# EAGLE board potbot_v7 (EAGLE 7.6.0)
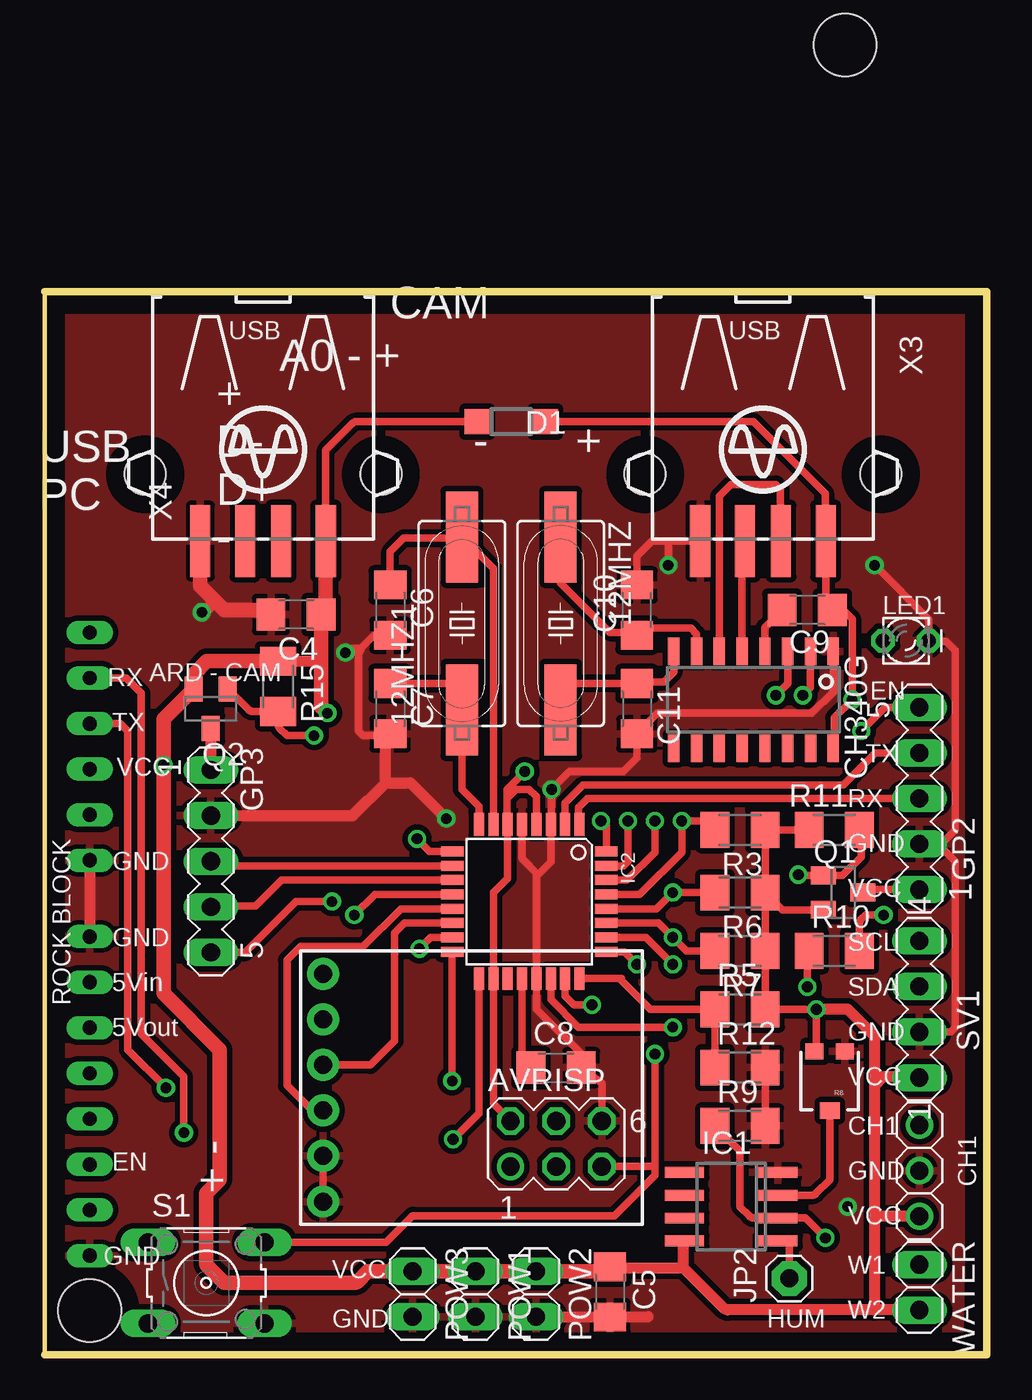
[diagram p0: board, top side]
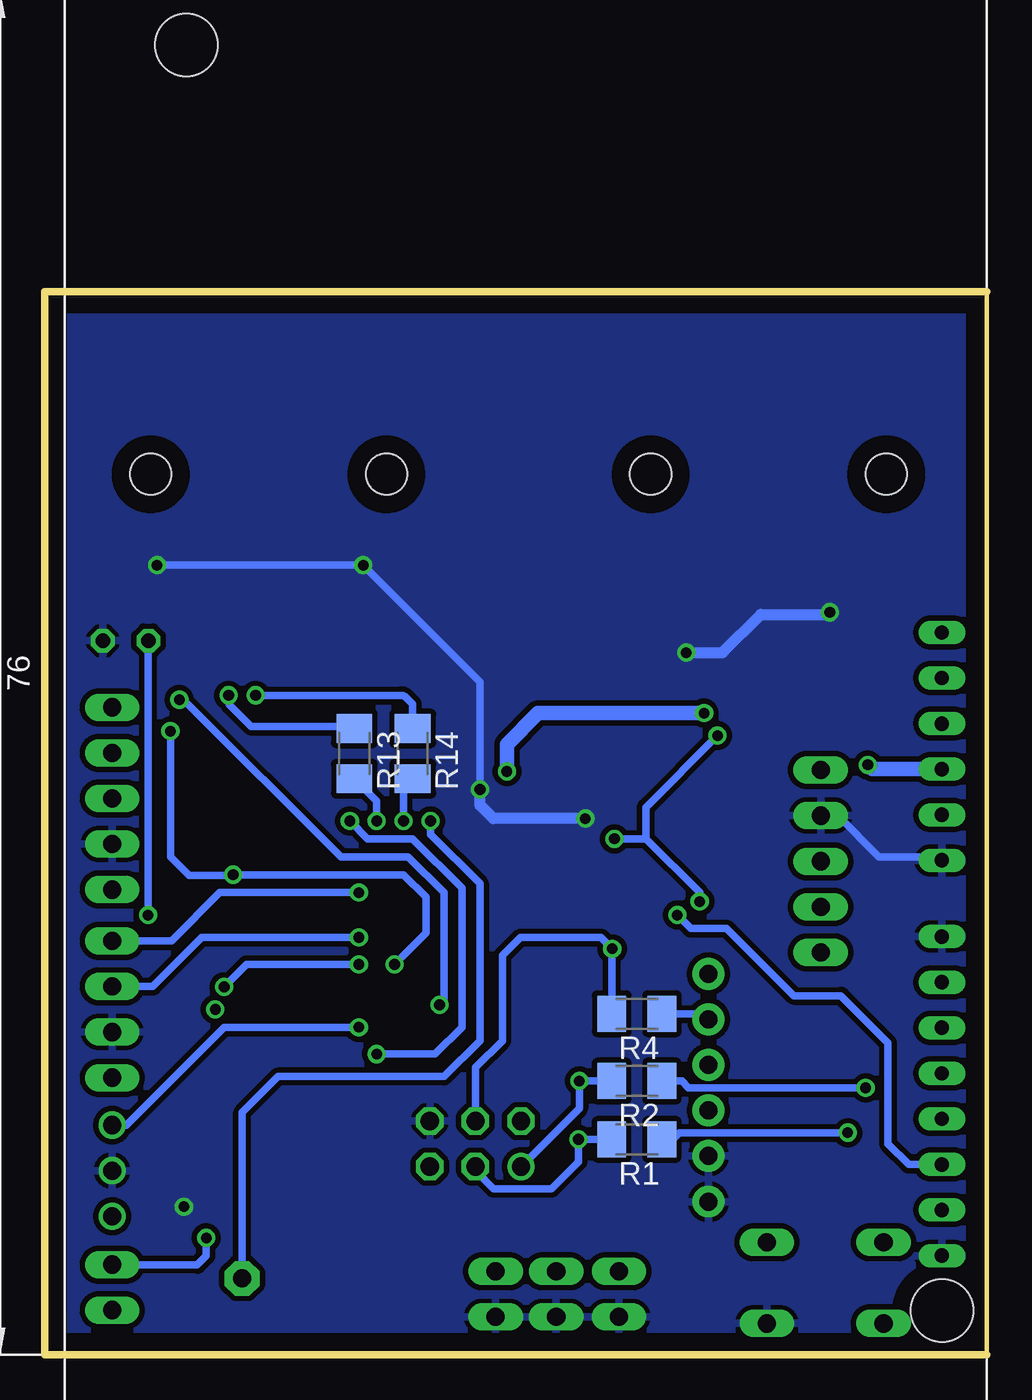
[diagram p1: board, bottom side, seen from below]

Size 52.5 x 59.25 mm. Coordinates in mm from the lower left corner, seen from the top.
Outline: 0,0 0,59.25 52.5,59.25 52.5,0 0,0
Copper layers (1*16): Top 0.035mm / dielectric 1.5mm / Bottom 0.035mm
Design rules "default *": minimum track width 0.14960625mm, minimum drill 24mil, track to track 6mil, track to pad 6mil, pad to pad 6mil, via to via 6mil, smd to smd 4mil, copper to edge 40mil, drill to drill 8mil, minimum pad ring 10mil, minimum via ring 8mil, stop-mask expansion 0mil, vias tented up to drill 0mil, thermal gap 10mil
Net classes: 1 supply: width 0.127 mm, clearance 0.203 mm

## Footprints (pad centres in the part's own frame; a part is rotated, then mirrored left to right if it is on the bottom)
SM49 = smd 5.08 x 1.778: 1 -4.826,0; 2 4.826,0
MA03-2 = drill 1.016: 1 -2.54,-1.27 | drill 1.016 octagon: 2 -2.54,1.27; 3 0,-1.27; 4 0,1.27; 5 2.54,-1.27; 6 2.54,1.27
OPENLOG = drill 1 pad 1.778: 1 13.97,1.27; 2 11.43,1.27; 3 8.89,1.27; 4 6.35,1.27; 5 3.81,1.27; 6 1.27,1.27
ROCKBLOCK = drill 0.8 long: 1 40.25,2.5; 2 37.71,2.5; 3 35.17,2.5; 4 32.63,2.5; 5 30.09,2.5; 6 27.55,2.5; 7 23.3,2.5; 8 20.76,2.5; 9 18.22,2.5; 10 15.68,2.5; 11 13.14,2.5; 12 10.6,2.5; 13 8.06,2.5; 14 5.52,2.5 | hole 3.5: 2.45,2.5; 73,44.6
C1206 = smd 1.6 x 1.8: 1 -1.4,0; 2 1.4,0
1X03 = drill 1.016: 1 -2.54,0; 2 0,0; 3 2.54,0
SOD123 = smd 1.4 x 1.4: A 1.9,0; C -1.9,0
MA05-1 = drill 1.016 long: 1 -5.08,0; 2 -2.54,0; 3 0,0; 4 2.54,0; 5 5.08,0
SO08 = smd 0.6 x 2.2: 1 -1.905,-2.6; 2 -0.635,-2.6; 3 0.635,-2.6; 4 1.905,-2.6; 5 1.905,2.6; 6 0.635,2.6; 7 -0.635,2.6; 8 -1.905,2.6
TQFP32-08 = smd 1.27 x 0.559: 1 -4.293,2.8; 2 -4.293,2; 3 -4.293,1.2; 4 -4.293,0.4; 5 -4.293,-0.4; 6 -4.293,-1.2; 7 -4.293,-2; 8 -4.293,-2.8; 17 4.293,-2.8; 18 4.293,-2; 19 4.293,-1.2; 20 4.293,-0.4; 21 4.293,0.4; 22 4.293,1.2; 23 4.293,2; 24 4.293,2.8 | smd 0.559 x 1.27: 9 -2.8,-4.293; 10 -2,-4.293; 11 -1.2,-4.293; 12 -0.4,-4.293; 13 0.4,-4.293; 14 1.2,-4.293; 15 2,-4.293; 16 2.8,-4.293; 25 2.8,4.293; 26 2,4.293; 27 1.2,4.293; 28 0.4,4.293; 29 -0.4,4.293; 30 -1.2,4.293; 31 -2,4.293; 32 -2.8,4.293
1X01 = drill 1.016 pad 1.93 octagon: 1 0,0
LED_LD260 = drill 0.813 octagon: A -1.27,0; K 1.27,0
1X02 = drill 1.016 long: 1 -1.27,0; 2 1.27,0
SOT23 = smd 1 x 1.4: 1 -0.95,-1.1; 2 0.95,-1.1; 3 0,1.1
M1206 = smd 1.6 x 2: 1 -1.4,0; 2 1.4,0
TRIMPOT-3MM = smd 1 x 0.9: 1 -0.85,-1.65; 3 0.85,-1.65 | smd 1.1 x 0.9: 2 0,1.65
B3F-10XX = drill 1.016 long: 1 -3.251,2.261; 2 3.251,2.261; 3 -3.251,-2.261; 4 3.251,-2.261
MA04-1 = drill 1.016 long: 1 -3.81,0; 2 -1.27,0; 3 1.27,0; 4 3.81,0
SOIC16 = smd 0.635 x 1.524: 1 -4.445,-2.695; 2 -3.175,-2.695; 3 -1.905,-2.695; 4 -0.635,-2.695; 5 0.635,-2.695; 6 1.905,-2.695; 7 3.175,-2.695; 8 4.445,-2.695; 9 4.445,2.695; 10 3.175,2.695; 11 1.905,2.695; 12 0.635,2.695; 13 -0.635,2.695; 14 -1.905,2.695; 15 -3.175,2.695; 16 -4.445,2.695
USB-A003 = smd 1.12 x 4: 1 -3.5,14; 2 -1,14; 3 1,14; 4 3.5,14 | hole 2.3: -6.57,10.28; 6.57,10.28

## Placement (x,y rotation side)
12MHZ  [SM49]  28.75,40.75 270 top
12MHZ1  [SM49]  23.25,40.75 90 top
AVRISP  [MA03-2]  28.5,11.75 0 top
BRD1  OPENLOG  [OPENLOG]  14.25,22.5 270 top
BRD2  ROCKBLOCK  [ROCKBLOCK]  0,0 90 bottom
C4  100n  [C1206]  14,41.25 180 top
C5  100n  [C1206]  31.5,3.5 270 top
C6  22pF  [C1206]  19.25,41.5 270 top
C7  22pF  [C1206]  19.25,36 270 top
C8  100n  [C1206]  28.5,16 0 top
C9  0.01uF  [C1206]  42.5,41.5 180 top
C10  22pF  [C1206]  33,41.5 90 top
C11  22pF  [C1206]  33,36 270 top
CH1  [1X03]  48.75,10.25 90 top
D1  MBR0520LT  [SOD123]  26,52 0 top
GP2  [MA05-1]  48.75,31 90 top
GP3  [MA05-1]  9.25,27.5 270 top
IC1  LM358MX  [SO08]  38.25,8.25 90 top
IC2  MEGA8-AI  [TQFP32-08]  27,25.25 270 top
JP2  [1X01]  41.5,4.25 90 top
LED1  [LED_LD260]  48,39.79 0 top
POW1  [1X02]  24,3.38 270 top
POW2  [1X02]  27.38,3.38 270 top
POW3  [1X02]  20.5,3.38 270 top
Q1  DMG2307L  [SOT23]  44.5,25.75 270 top
Q2  DMG2307L  [SOT23]  9.25,36 180 top
R1  100  [M1206]  19.5,12 180 bottom
R2  100  [M1206]  19.5,15.25 180 bottom
R3  1k  [M1206]  38.75,29.25 180 top
R4  100  [M1206]  19.5,19 180 bottom
R5  1.5k  [M1206]  38.75,19.25 0 top
R6  4.7k  [M1206]  38.75,25.75 180 top
R7  4.7k  [M1206]  38.75,22.5 180 top
R8  100k  [TRIMPOT-3MM]  43.75,15.25 180 top
R9  10k  [M1206]  38.75,12.75 0 top
R10  1k  [M1206]  44,22.5 0 top
R11  10k  [M1206]  44,29.25 0 top
R12  1.5k  [M1206]  38.75,16 0 top
R13  1k  [M1206]  35.25,33.5 270 bottom
R14  1k  [M1206]  32,33.5 270 bottom
R15  10k  [M1206]  13,37.25 270 top
S1  [B3F-10XX]  9,4 0 top
SV1  [MA04-1]  48.75,19.25 90 top
U$4  CH340G  [SOIC16]  39.5,36.5 180 top
WATER  [1X02]  48.75,3.75 270 top
X3  [USB-A003]  40.03,59.35 180 top
X4  [USB-A003]  12.16,59.35 180 top

## Library data of the parts
12MHZ 12MHZ1 = crystal; OC_FARNELL: unknown; OC_NEWARK: unknown
AVRISP GP2 GP3 SV1 = con-lstb; OC_FARNELL: unknown; OC_NEWARK: unknown
BRD1 BRD2 Q1 Q2 = FORTRONIC
C4 C5 C8 R1-R7 R9-R15 = rcl
C6 C7 C9-C11 CH1 JP2 = adafruit
D1 = diode
IC1 = linear
IC2 = atmel; MPN: ATMEGA8-16AU; OC_FARNELL: 9171371; OC_NEWARK: 73M8863
LED1 = eagle-ltspice; SPICEMODEL: NONE; SPICEPREFIX: D; SPICETYPE: diode
POW1-POW3 WATER = pinhead
R8 = SparkFun-Electromechanical; PROD_ID: RES-09285
S1 = switch-omron; MPN: B3F-1000; OC_FARNELL: 176432; OC_NEWARK: 36M3542
U$4 = ch340
X3 X4 = con-yamaichi; OC_FARNELL: unknown; OC_NEWARK: unknown

## Nets
5V_IN: BRD2.8
5V_OUT: BRD2.9
A6: IC2.19
AN01: CH1.3 IC2.22
ARD_D+: U$4.5 X3.3
ARD_D-: U$4.6 X3.2
BAT: BRD2.13
EN_GPS1: BRD2.12 IC2.12
EN_GPS2: GP2.5 IC2.25 Q1.1 R11.2
EN_GPS3: GP3.5 IC2.9 Q2.1 R15.2
EN_OL: BRD1.3 IC2.13
GND: AVRISP.6 BRD1.1 BRD1.2 BRD2.6 BRD2.7 BRD2.14 C4.2 C5.2 C6.2 C7.2 C8.2 C10.2 C11.2 CH1.2 GP2.2 GP3.2 IC1.4 IC2.3 IC2.5 IC2.21 LED1.K POW1.2 POW2.2 POW3.2 R8.1 R9.2 R12.2 S1.4 SV1.2 U$4.1 X3.4 X4.4
HUM: IC1.1 IC2.32 JP2.1
LED: IC2.26 R10.1
MISO: AVRISP.1 IC2.16 R2.2
MOSI: AVRISP.4 IC2.15 R4.2
N$1: 12MHZ.1 C10.1 U$4.7
N$2: IC1.2 R9.1 WATER.1
N$3: IC1.3 R8.2
N$4: LED1.A R10.2
N$5: 12MHZ.2 C11.1 U$4.8
N$8: C9.2 U$4.4
N$10: R13.1 U$4.2
N$18: R14.1 U$4.3
N$35: 12MHZ1.2 C6.1 IC2.7
N$36: 12MHZ1.1 C7.1 IC2.8
N$37: C8.1 IC2.20
RESET: AVRISP.5 IC2.29 R3.2 S1.2
RX_GPS1: BRD2.3 R2.1
RX_GPS2: GP2.3 IC2.1
RX_GPS3: GP3.3 IC2.10
RX_OL: BRD1.4 IC2.14
RXI: IC2.30 R13.2
SCK: AVRISP.3 IC2.17 R1.2
SCL: IC2.28 R6.2 SV1.4
SDA: IC2.27 R7.2 SV1.3
TX0: IC2.31 R14.2
TX_GPS1: BRD2.2 R1.1
TX_GPS2: GP2.4 IC2.2
TX_GPS3: GP3.4 IC2.11
TX_OL: BRD1.5 R4.1
V_BAT: IC2.24 R5.1 R12.1
VBUS: C9.1 D1.A IC2.23 U$4.16 X3.1
VCC [supply]: AVRISP.2 BRD2.4 C4.1 C5.1 CH1.1 D1.C IC1.8 IC2.4 IC2.6 IC2.18 POW1.1 POW2.1 POW3.1 Q1.2 Q2.2 R3.1 R5.2 R6.1 R7.1 R8.3 R11.1 R15.1 SV1.1 WATER.2 X4.1
VCC_GPS2: GP2.1 Q1.3
VCC_GPS3: GP3.1 Q2.3

## Tracks (layer width: path | path; a pad name or v marks a point on that pad's centre or on a via)
AN01  (via drill 0.6)
  Top 0.406: IC2.22 28.2,19.8 29.75,18.25 v35,18.25
  Bottom 0.406: CH1.3 47.96,12.79 42.5,18.25 v35,18.25
ARD_D+
  Top 0.406: U$4.5 38.87,45.19 X3.3
ARD_D-
  Top 0.406: U$4.6 37.59,47.84 38.25,48.5 40.75,48.5 41,48.25 41,45.38 X3.2
EN_GPS1  (via drill 0.6)
  Top 0.406: IC2.12 18.4,25.65 v17.25,24.5
  Bottom 0.406: v17.25,24.5 16.5,23.75 14.5,23.75 10.75,20 8.12,20 5.5,17.38 5.5,11.75 4.35,10.6 BRD2.12
EN_GPS2  (via drill 0.6)
  Top 0.406: IC2.25 32.3,22.45 v33,21.75 | R11.2 45.5,29.15 45.5,27.75 44.45,26.7 Q1.1 42.05,26.7 v42,26.75 | v45.5,34.75 46.83,36.08 GP2.5
  Bottom 0.406: v33,21.75 31.25,23.5 31.25,25.5 32.5,26.75 v42,26.75 42.05,26.7 44.45,26.7 45.5,27.75 v45.5,34.75
EN_GPS3  (via drill 0.6)
  Top 0.406: IC2.9 21.45,28.05 v20.75,28.75 | v15,34.5 13.5,34.5 13.09,34.91 arc-45 13,35.13 R15.2 11.58,35.85 arc-45 11.36,35.94 Q2.1 | GP3.5 11.17,22.42 14,25.25 v16,25.25
  Bottom 0.406: v15,34.5 19,30.5 19,28.75 | v16,25.25 16,25.75 19,28.75 | v20.75,28.75 19,28.75
EN_OL
  Top 0.406: IC2.13 19.85,24.85 17.75,22.75 14.25,22.75 13.5,22 13.5,15 14.89,13.61 BRD1.3
GND  (via drill 0.6)
  Top 0.406: 34.75,45.35 X3.4 36.53,43.53 | 34.75,45.35 33.85,45.35 33,44.5 C10.2 | 27.5,26.75 27.4,26.65 IC2.21 27.4,19.25 29.9,16.75 C8.2 31.04,15.11 AVRISP.6 | 27.5,26.75 28.2,27.45 IC2.3 28.25,29.59 v28.25,31.5 29.25,32.5 32.25,32.5 33,33.25 C11.2 34.15,35.75 42.75,35.75 43.95,36.95 U$4.1 | IC2.5 26.6,27.65 27.5,26.75 | C6.2 18.35,40.1 17.5,39.25 17.5,34.75 17.75,34.5 19.15,34.5 C7.2 | R9.2 R12.2 | SV1.2 48.73,18 50.5,18 50.75,18.25 50.75,27.5 49.75,28.5 48.79,28.5 GP2.2 49.96,28.46 50.75,29.25 50.75,39.25 50.25,39.75 49.31,39.75 LED1.K 49.27,40.98 v46.25,44 | v34.75,44 34.75,45.35 | BRD1.1 BRD1.2
  Top 0.61: GP3.2 17.16,30.04 19,31.88 | 19,31.88 19,34.35 C7.2 | 19,31.88 20.38,31.88 v22.38,29.88 | BRD2.6 BRD2.7 | POW2.2 C5.2 33.6,2.1 33.62,2.12 | 17.5,39.25 16.88,39.25 v16.75,39.12 | v8.75,41.38 8.88,41.38 9.5,42
  Top 0.813: X4.4 8.66,42.84 9.5,42 10,41.5 12.35,41.5 C4.2
  Bottom 0.406: v46.25,44 v34.75,44 28.25,37.5 v28.25,31.5 | GP3.2 8.29,30.04 6,27.75 2.7,27.75 BRD2.6
  Bottom 0.61: v22.38,29.88 27.5,29.88 28.25,30.62 v28.25,31.5 | v16.75,39.12 14.72,39.12 C4.2 8.88,41.25 v8.75,41.38
  other vias: 44.75,8.25
  pour Top (isolate 0.305): 0,0 0,59 52,59 51,0
  pour Bottom (isolate 0.305): 0,0 0,59 52,59 51,0
HUM  (via drill 0.6)
  Top 0.406: IC2.32 31.29,29.46 v31,29.75 | JP2.1 41.5,6.2 IC1.1
  Bottom 0.406: v31,29.75 31,29 28.25,26.25 28.25,17.5 30.25,15.5 39.5,15.5 41.5,13.5 JP2.1
LED  (via drill 0.6)
  Top 0.406: IC2.26 33.5,23.25 v35,21.75 | v42.5,20.5 42.5,22.4 R10.1
  Bottom 0.406: v35,21.75 41.25,21.75 v42.5,20.5
MISO  (via drill 0.6)
  Top 0.406: IC2.16 v22.71,15.25
  Bottom 0.406: R2.2 v22.71,15.25 22.71,13.73 AVRISP.1
MOSI  (via drill 0.6)
  Top 0.406: IC2.15 21.5,23.25 v20.88,22.62
  Bottom 0.406: AVRISP.4 28.5,16 27,17.5 27,22.25 26,23.25 21.5,23.25 v20.88,22.62 20.9,22.6 R4.2
N$1
  Top 0.406: U$4.7 36.33,40.17 36,40.5 33.4,40.5 C10.1 | C10.1 33,40 | 12MHZ.1 28.75,43 31.5,40.25 32.85,40.25 C10.1
N$2  (via drill 0.6)
  Top 0.406: v43.5,6.5 42.38,7.62 IC1.2 39.52,7.62 arc-45 39.29,7.71 38.75,8.25 38.75,11.22 arc45 38.66,11.44 R9.1 37.5,12.6
  Bottom 0.406: v43.5,6.5 43.5,5.5 44,5 48.73,5 WATER.1
N$3
  Top 0.406: IC1.3 42.75,8.88 arc45 42.98,8.98 43.75,9.75 R8.2
N$4  (via drill 0.6)
  Top 0.406: R10.2 45.4,24.02 arc-45 45.49,24.24 45.75,24.5 v46.75,24.5
  Bottom 0.406: v46.75,24.5 46.75,39.77 LED1.A
N$5
  Top 0.406: U$4.8 35.05,38.05 34.5,37.5 33.1,37.5 C11.1 28.9,37.4 28.75,37.25 12MHZ.2
N$8
  Top 0.406: U$4.4 40.13,40.53 C9.2
N$10  (via drill 0.6)
  Top 0.406: U$4.2 42.67,37.17 v42.25,36.75
  Bottom 0.406: 35.48,35 arc45 R13.1 | v42.25,36.75 42.25,36.38 arc-45 42.16,36.16 41,35 35.48,35 | 35.48,35 arc45 R13.1 | R13.1
N$18  (via drill 0.6)
  Top 0.406: U$4.3 41.41,37.41 v40.75,36.75
  Bottom 0.406: v40.75,36.75 32.63,36.75 arc45 32.41,36.66 32,36.25 R14.1
N$35
  Top 0.406: IC2.7 25,43.83 12MHZ1.2 23.17,45.5 20,45.5 19.25,44.75 C6.1
N$36
  Top 0.406: C7.1 23.1,37.4 23.25,37.25 12MHZ1.1 23.25,31.5 24.2,30.55 IC2.8
N$37
  Top 0.406: IC2.20 26.6,16.5 C8.1
RESET  (via drill 0.6)
  Top 0.406: IC2.29 33.15,25.65 35.5,28 v35.5,29.75 36.85,29.75 R3.2 | v34,16.75 34,10.5 | 34,10.5 34,10 31.75,7.75 20.5,7.75 19.01,6.26 S1.2 | 34,10.5 31.06,10.5 AVRISP.5
  Bottom 0.406: v35.5,29.75 34.5,28.75 32,28.75 29.25,26 29.25,18.25 30.75,16.75 v34,16.75
RX_GPS1  (via drill 0.6)
  Top 0.406: BRD2.3 4.21,35.17 4.62,34.75 4.62,17 v6.75,14.88
  Bottom 0.406: R2.1 17,15.25 16.62,14.88 v6.75,14.88
RX_GPS2
  Top 0.406: GP2.3 30.25,31 29.75,30.5 29.75,29.59 IC2.1
RX_GPS3
  Top 0.406: IC2.10 9.5,27.25 GP3.3
RX_OL
  Top 0.406: IC2.14 20.05,24.05 19.5,23.5 19.5,17.5 18.15,16.15 BRD1.4
RXI  (via drill 0.6)
  Top 0.406: IC2.30 32.45,26.45 34,28 v34,29.75
  Bottom 0.406: v34,29.75 34,30.85 R13.2
SCK  (via drill 0.6)
  Top 0.406: IC2.17 24.2,13.45 v22.75,12
  Bottom 0.406: AVRISP.3 28,9.75 27.5,9.25 24.25,9.25 22.75,10.75 v22.75,12 R1.2
SCL  (via drill 0.6)
  Top 0.406: IC2.28 34.1,24.85 v35,25.75 R6.2
  Bottom 0.406: SV1.4 45.44,23.06 42.75,25.75 v35,25.75
SDA  (via drill 0.6)
  Top 0.406: IC2.27 34.2,24.05 v35,23.25 35.75,22.5 R7.2
  Bottom 0.406: SV1.3 46.48,20.52 43.75,23.25 v35,23.25
TX0  (via drill 0.6)
  Top 0.406: IC2.31 32.25,27.25 32.5,27.5 v32.5,29.75
  Bottom 0.406: v32.5,29.75 32.5,31.6 R14.2
TX_GPS1  (via drill 0.6)
  Top 0.406: BRD2.2 4.54,37.71 5.38,36.88 5.38,17.88 7.75,15.5 v7.75,12.38
  Bottom 0.406: R1.1 17.5,12 17.12,12.38 v7.75,12.38
TX_GPS2
  Top 0.406: IC2.2 29,30.75 30,31.75 44.5,31.75 46.29,33.54 GP2.4
TX_GPS3
  Top 0.406: IC2.11 13.2,26.45 11.75,25 9.29,25 GP3.4
TX_OL
  Bottom 0.406: R4.1 15.96,19 arc45 15.74,18.91 BRD1.5
V_BAT
  Top 0.406: IC2.24 32.14,20.96 32.14,20.86 33.75,19.25 R5.1 R12.1
VBUS  (via drill 0.6)
  Top 0.406: U$4.16 44,33.86 44,35.5 v45,36.5 45,41 44.5,41.5 C9.1 43.53,41.87 X3.1 43.5,45.38 43.5,48 39.5,52 D1.A | IC2.23 29,20 29.5,19.5 v30.5,19.5
  Bottom 0.406: v45,36.5 44.75,36.5 36,27.75 32.25,27.75 30.25,25.75 30.25,19.75 v30.5,19.5
VCC  (via drill 0.6)
  Top 0.406: R6.1 R3.1 R11.1 | R6.1 R7.1 R5.2 v43,19.25 43,17.3 R8.3 | IC2.4 27.4,31.1 27,31.5 26.25,31.5 25.75,31 | 25.75,31 25.75,29.59 IC2.6 25.8,26.55 25,25.75 IC2.18 25,13.98 AVRISP.2 | 25.75,31 25.75,31.5 v26.75,32.5 | D1.C 17.38,52 arc45 17.16,51.91 15.66,50.41 X4.1 | Q1.2 41.1,24.8 R6.1 | 48.77,2.5 WATER.2
  Top 0.61: R15.1 15.25,38.65 15.4,38.5 | 31.25,4.64 C5.1 31.55,4.84 35.59,4.84 | CH1.1 46.29,7.71 46.25,7.75 | 46.25,2.5 46.25,7.75 | 46.25,7.75 46.25,15 | 46.25,15 46.75,15.5 48.69,15.5 SV1.1 | WATER.2 48.73,2.5 46.25,2.5 | 46.25,15 46.25,17.75 44.75,19.25 v43,19.25 | 46.25,2.5 38.07,2.5 arc-45 37.85,2.59 35.59,4.84 | 35.59,4.84 35.59,6.21 arc-45 IC1.8
  Top 0.813: 15.66,35.84 v15.75,35.75 15.4,36.1 15.4,38.5 C4.1 15.66,41.51 X4.1 | R15.1 9.03,38.65 8.38,38 8.38,37.17 Q2.2 6.62,35.42 v6.62,32.88 6.62,20.12 9.75,17 9.75,9.88 arc-45 9.66,9.66 9,9 9,5.13 arc45 9.09,4.91 10,4 17.22,4 arc45 17.45,4.09 18,4.64 POW3.1 POW1.1 POW2.1 31.25,4.64
  Bottom 0.406: 47.56,15.44 SV1.1 50.06,15.44
  Bottom 0.813: v15.75,35.75 25,35.75 26.75,34 v26.75,32.5 | BRD2.4 6.38,32.63 v6.62,32.88
VCC_GPS2
  Top 0.406: GP2.1 45.77,25.92 Q1.3
VCC_GPS3
  Top 0.61: Q2.3 GP3.1

## Text on the board
tNames: CAM | A0 - + | - + | USB / PC | + / D- / D+ / - | ARD - CAM | RX | EN | TX | TX | VCC | RX | GND | GND | VCC | GND | SCL | 5Vin | SDA | ROCK BLOCK | 5Vout | GND | VCC | CH1 | EN | GND | + - | VCC | GND | VCC | W1 | GND | HUM | W2